# Altium PCB TK517_P5V0-PSU.PcbDoc
Units mm, origin at the board's own origin, x right, y up, seen from the top; angles counter-clockwise.
Board outline 77.5 x 82.75 mm, 4 copper layers (TopLayer, InternalPlane1, InternalPlane2, BottomLayer); 15 components, 10 nets, 74 pads, 0 vias.
Unrouted connection lines stored in the file: 1.
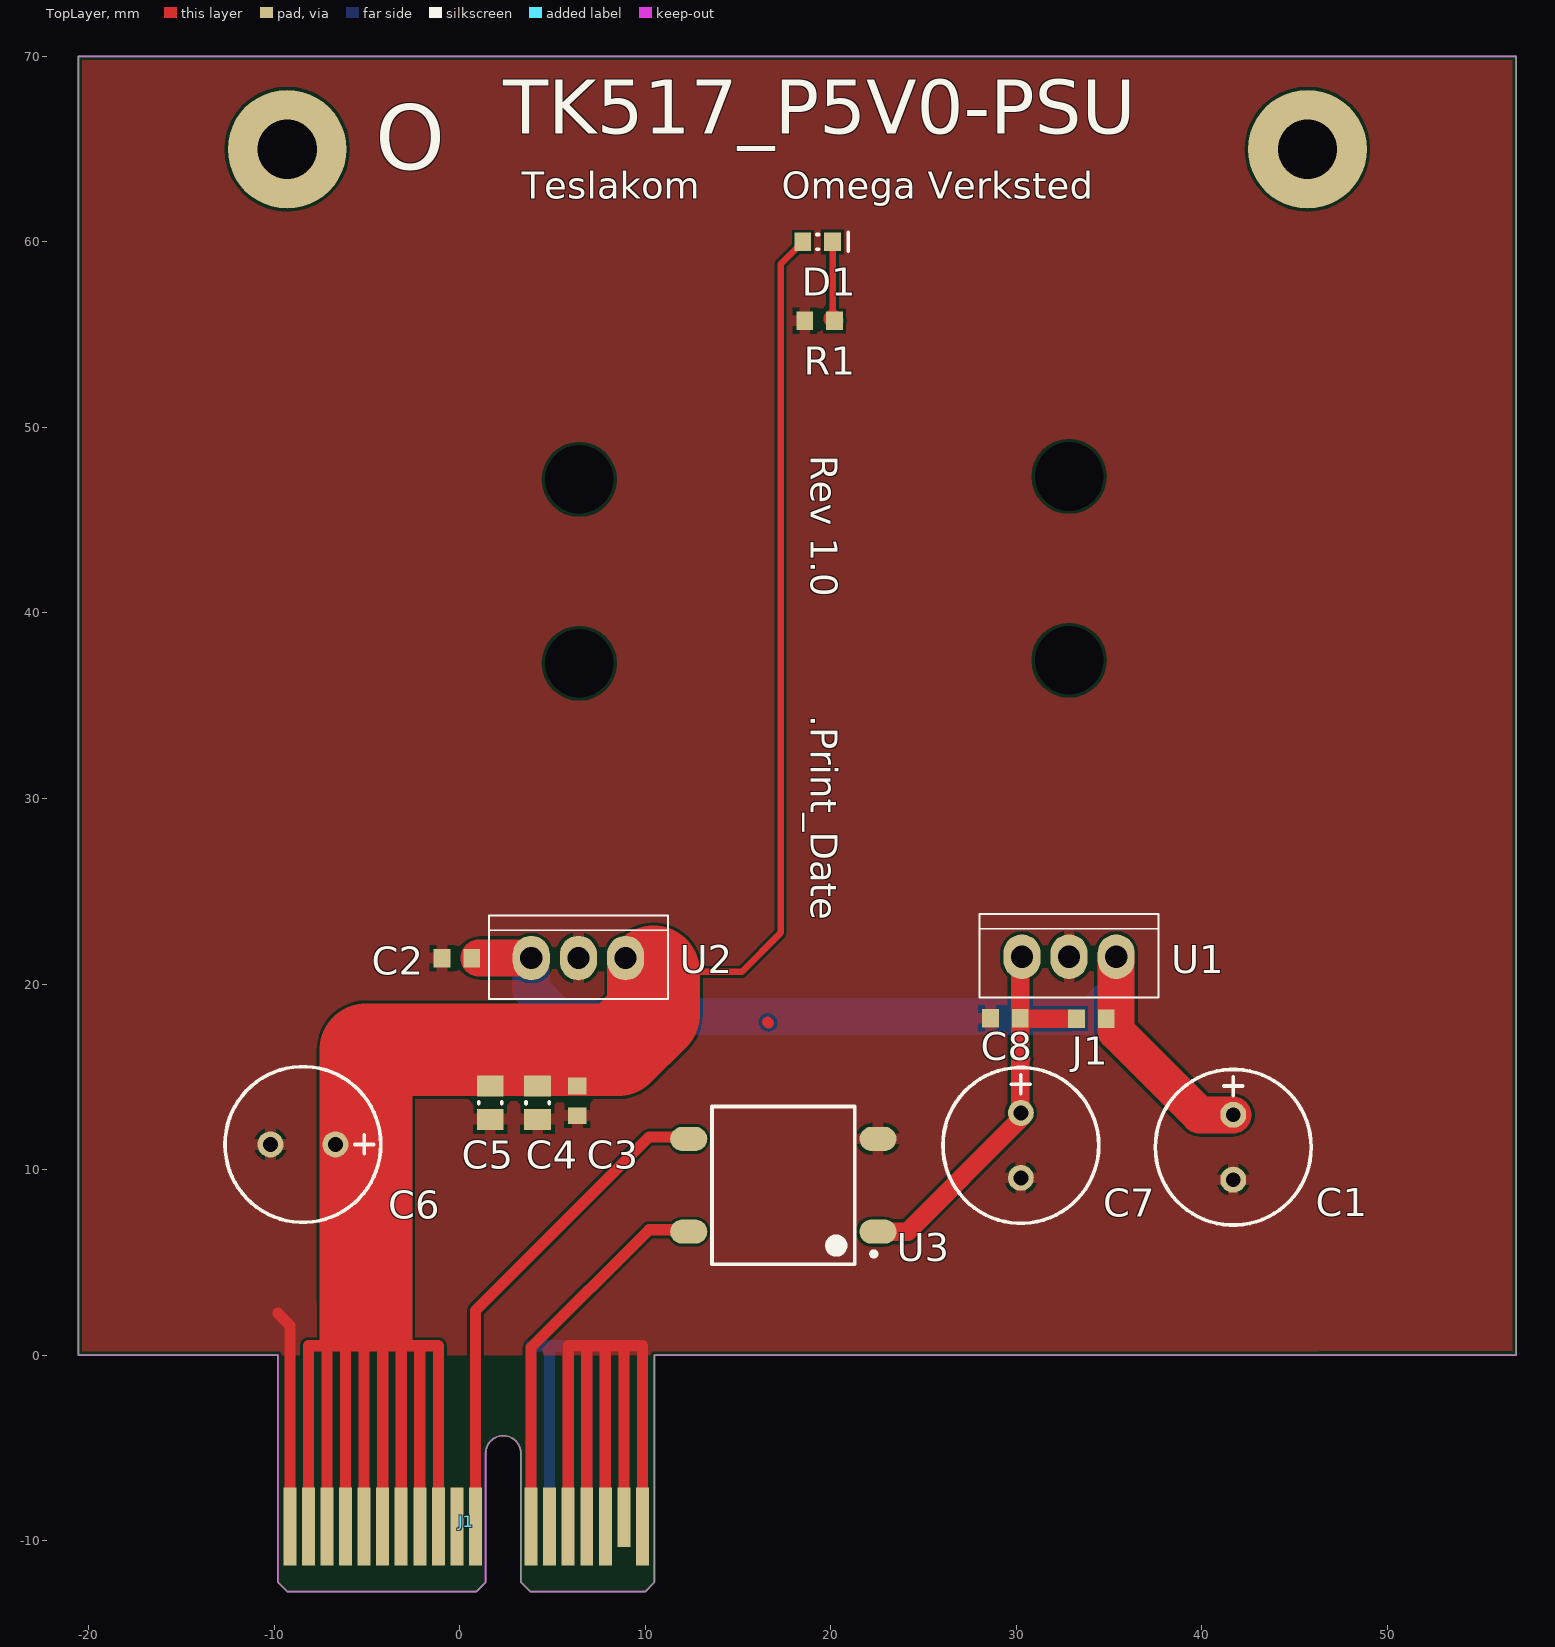
[diagram p0: TopLayer view]
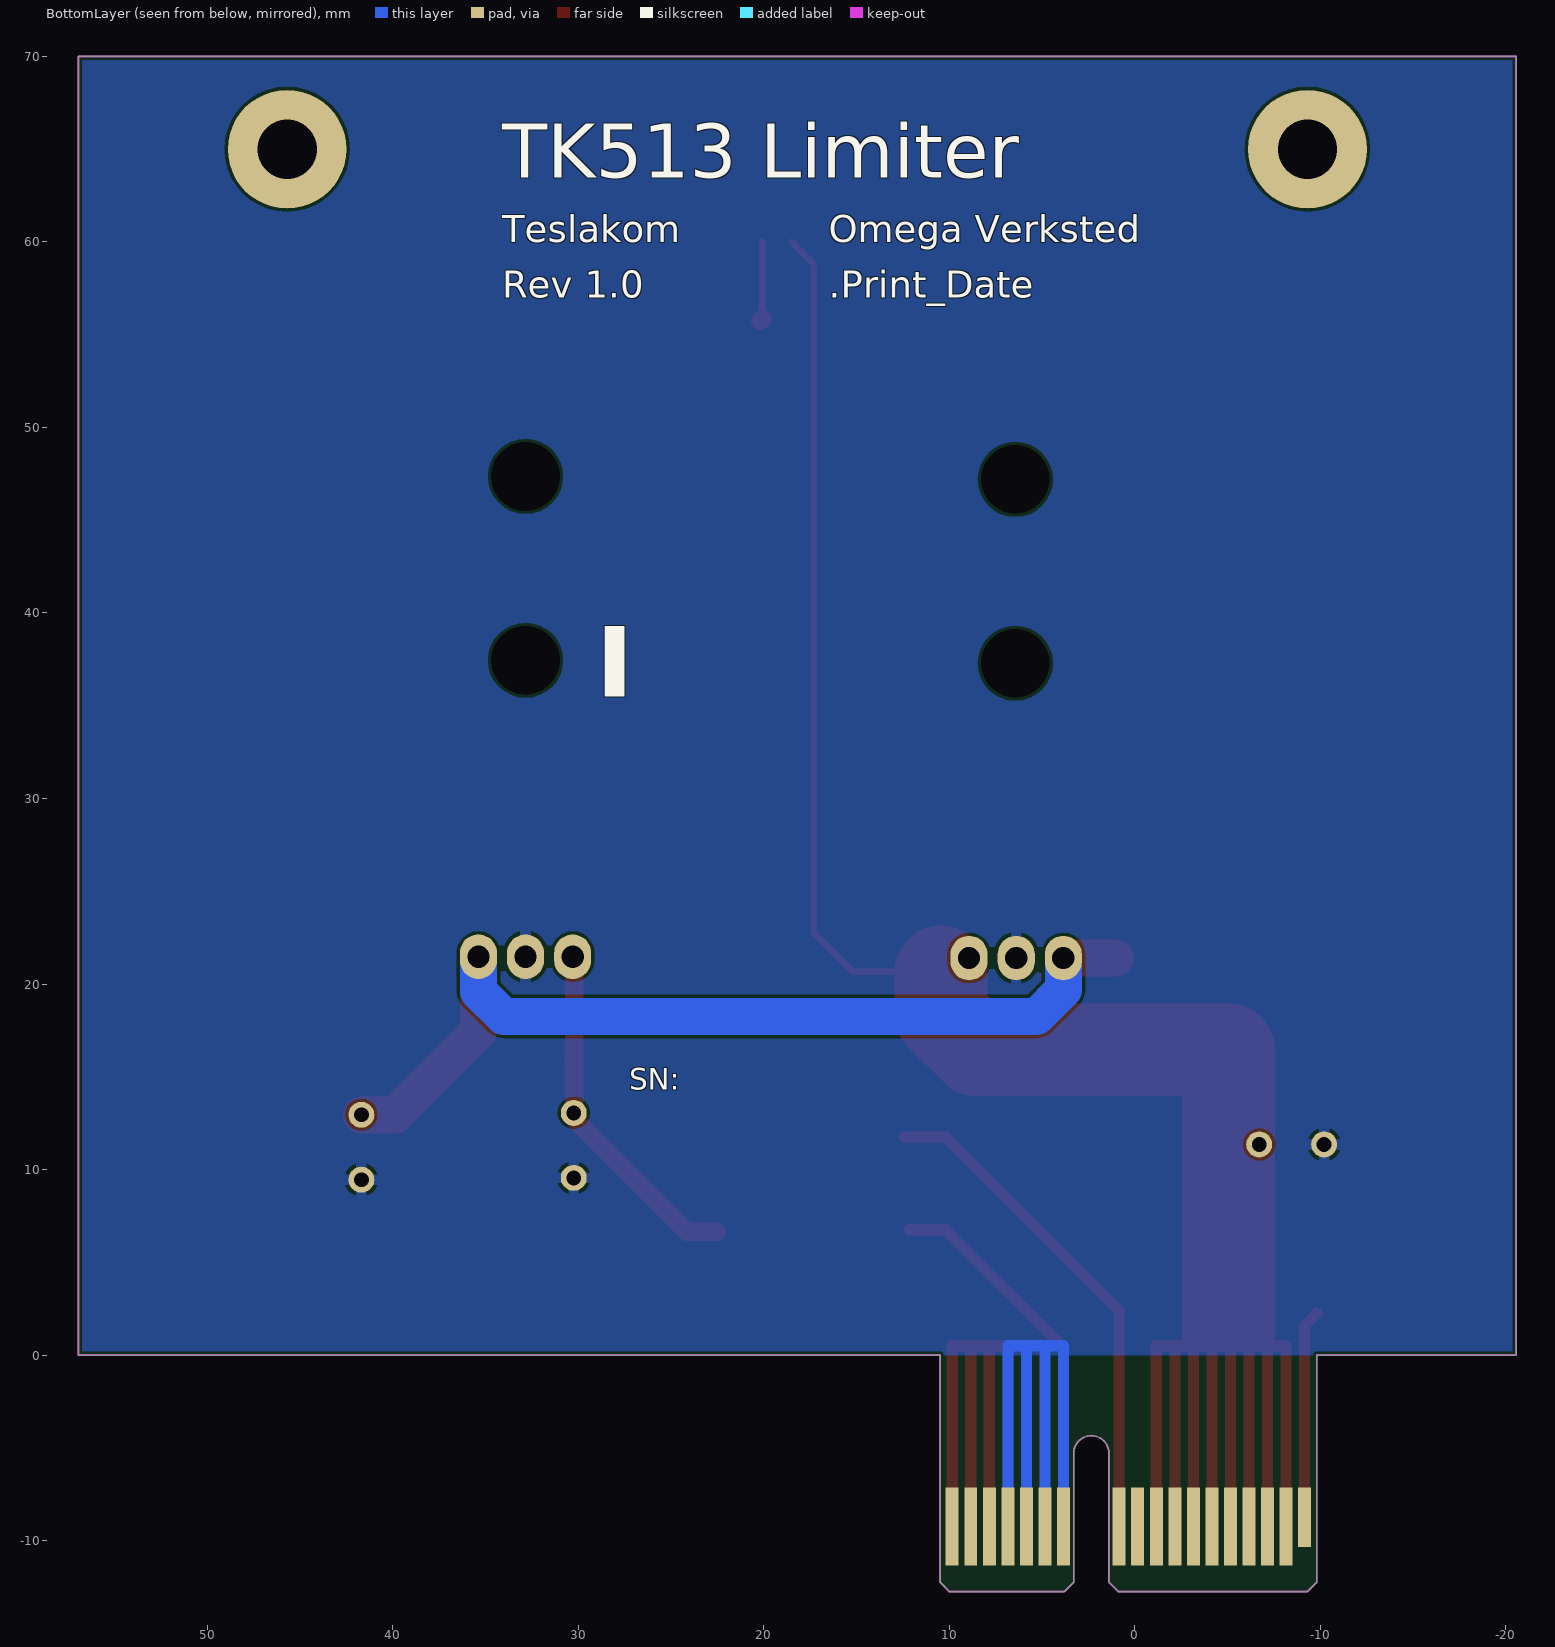
[diagram p1: BottomLayer view, seen from below]
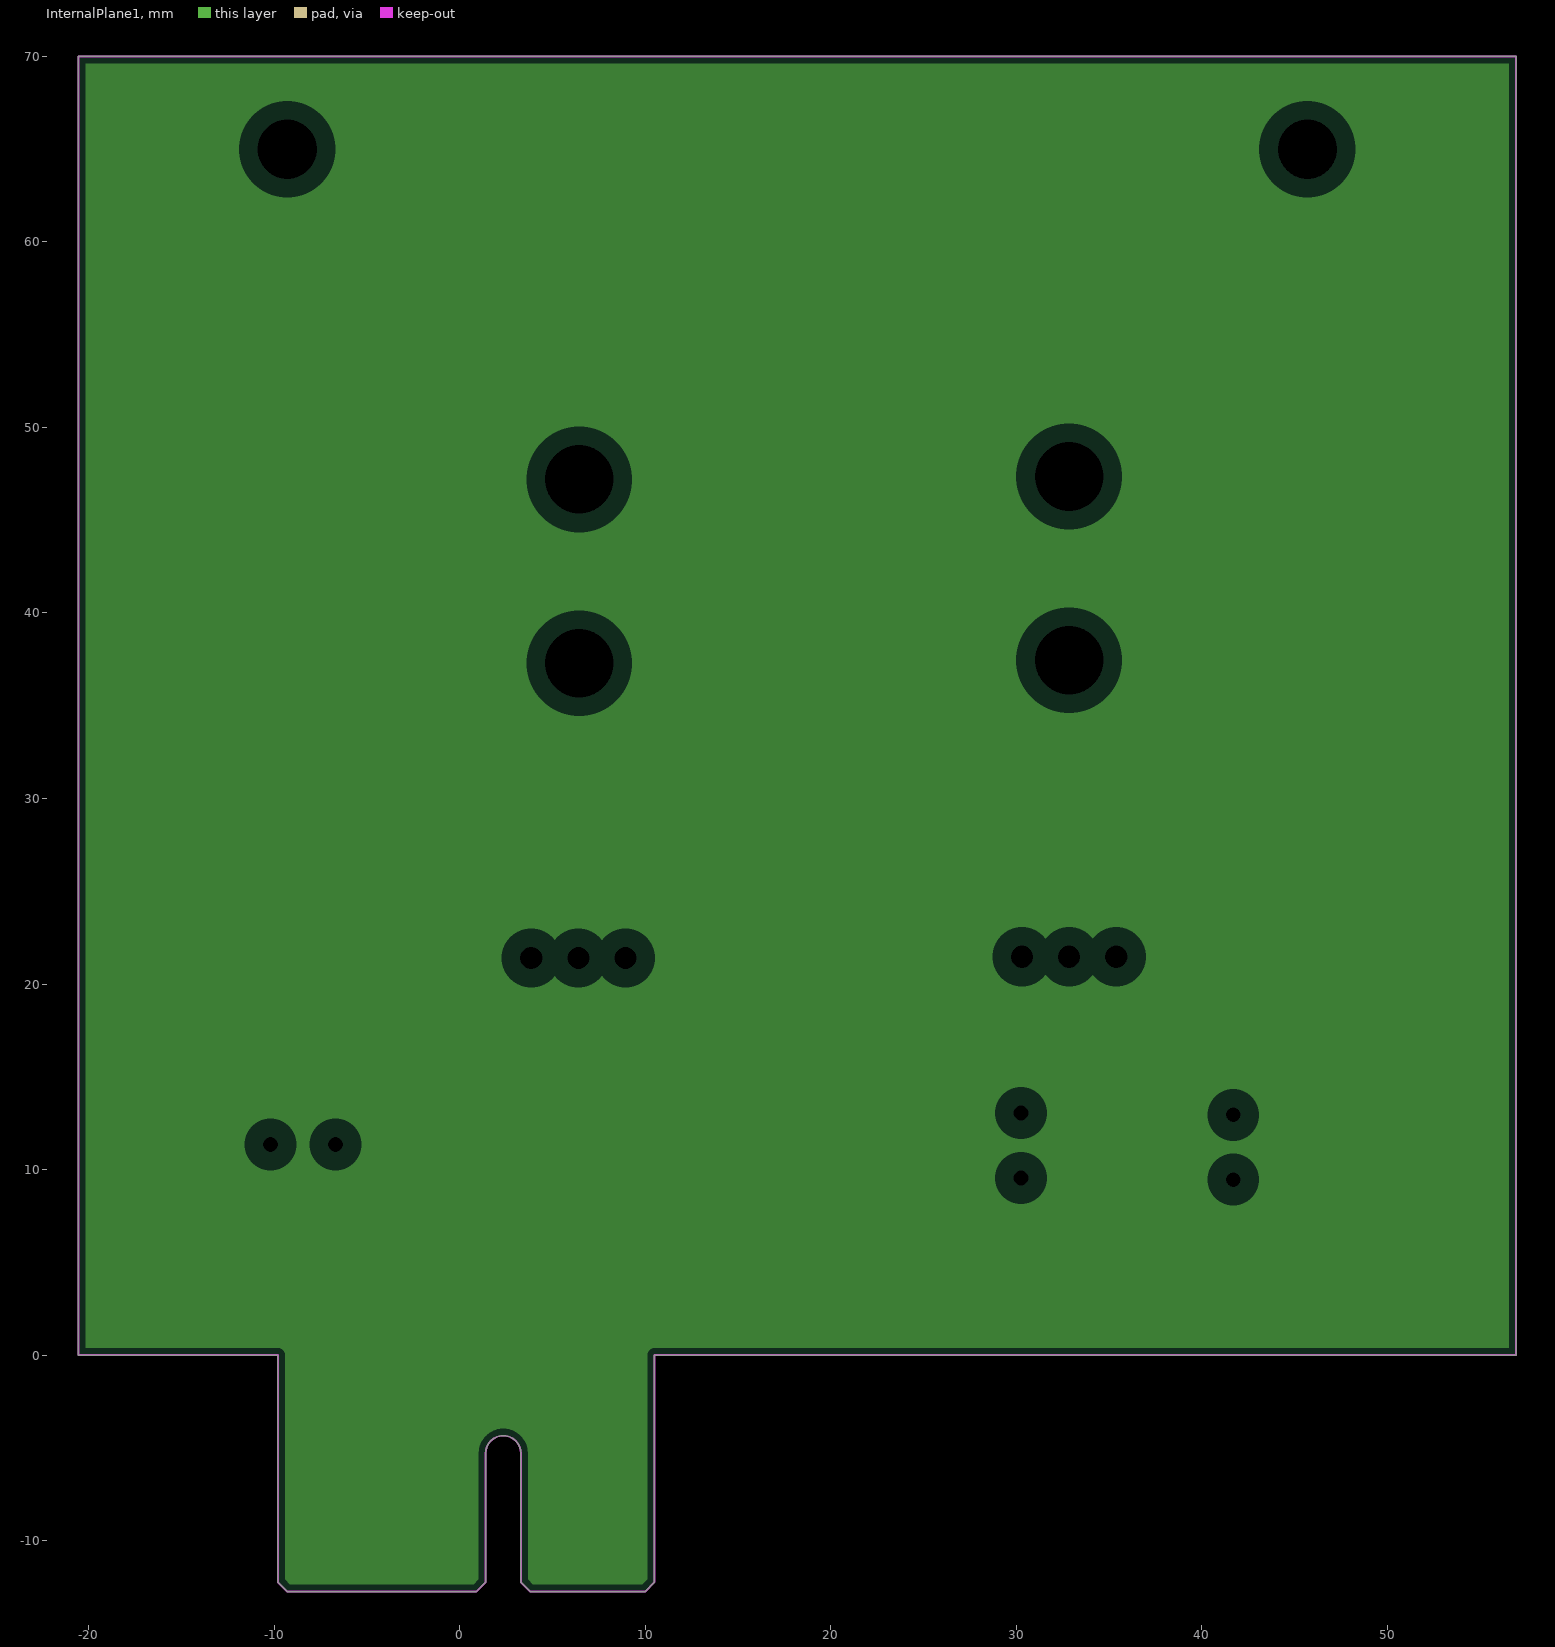
[diagram p2: InternalPlane1, clearances drawn from the general rule]
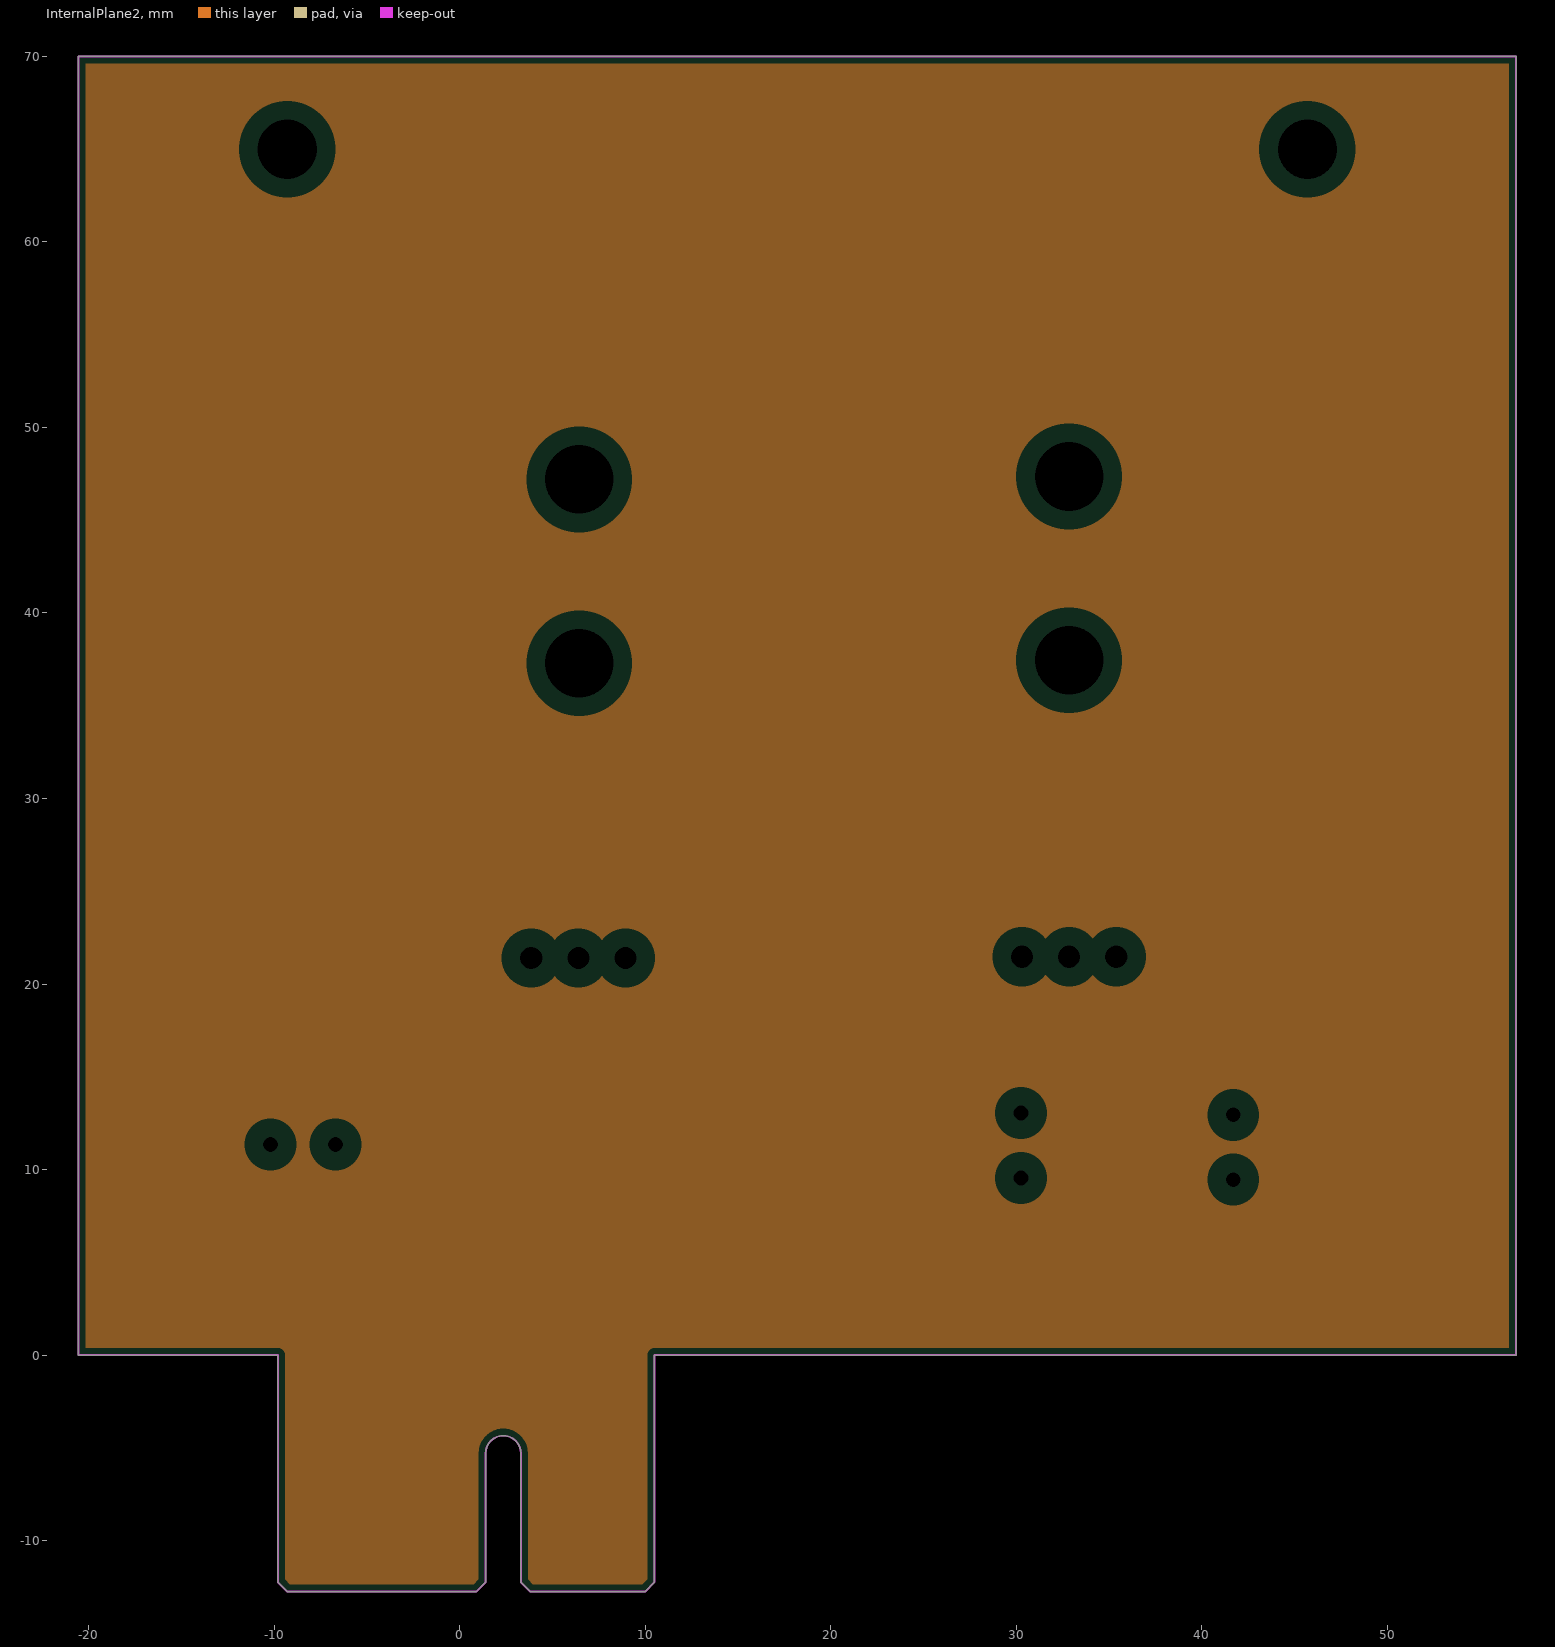
[diagram p3: InternalPlane2, clearances drawn from the general rule]

## Layer stack, top to bottom
TopSolder: solder mask 0.0102, Solder Resist, Dk 3.5
TopLayer: signal copper 0.0178
Dielectric1: core 0.32, FR-4, Dk 4.8
InternalPlane1: plane copper 0.0356
Dielectric2: prepreg 0.32, FR-4, Dk 4.8
InternalPlane2: plane copper 0.0356
Dielectric3: core 0.32, FR-4, Dk 4.8
BottomLayer: signal copper 0.0178
BottomSolder: solder mask 0.0102, Solder Resist, Dk 3.5

## Board outline
-20.55,0 -9.8,0 -9.8,-12.25 -9.3,-12.75 0.9,-12.75 1.4,-12.25 1.4,-5.3 cw(c2.35,-5.3) 3.3,-5.3 3.3,-12.25 3.8,-12.75 10,-12.75 10.5,-12.25 10.5,0 56.95,0 56.95,70 -20.55,70

## Design rules (kind name [scope] priority, off if disabled: settings)
Clearance [All] p1: gap=0.16 ignorepadtopadclearanceinfootprint=FALSE except(0: Arc-Text Arc-Hole Track-Text Track-Hole SMDPad-Text SMDPad-Hole THPad-Text THPad-Hole Via-Text Via-Hole Fill-Text Fill-Hole Poly-Text Poly-Hole Region-Text Region-Hole Text-Text Text-Hole)
Height [All] p1: minheight=0 maxheight=200 prefheight=12.7
HoleSize [All] p1: absolutevalues=TRUE maxlimit=6.35 minlimit=0.3 maxpercent=80.000 minpercent=20.000
MinimumSolderMaskSliver [All] p1: minsoldermaskwidth=0.1
PlaneClearance [All] p1: clearance=1
PlaneConnect [All] p1: planeconnectstyle=Relief reliefexpansion=0.508 reliefentries=4 reliefconductorwidth=1 reliefairgap=0.254
PolygonConnect TheBestRule [IsVia AND InNet('GND')] p1: connectstyle=Direct reliefconductorwidth=0.4 reliefentries=4 polygonreliefangle="90 Angle" airgapwidth=0.2
PolygonConnect [All] p2: connectstyle=Relief reliefconductorwidth=0.6 reliefentries=4 polygonreliefangle="90 Angle" airgapwidth=0.2
RoomDefinition TK517_P5V0-PSU [InComponentClass('TK517_P5V0-PSU')] p1: confinementstyle=ConfineOut formatcopy=TRUE lockcomponents=FALSE outline 10.5,0 -9.8,0 -9.8,-7 10.5,-7
RoutingVias [All] p1: holewidth=0.711 width=1.27 viastyle="Through Hole" minholewidth=0.711 minwidth=1.27 maxholewidth=0.711 maxwidth=1.27
SilkToSolderMaskClearance [IsPad] p1: minsilkscreentomaskgap=0.178 clearancetoexposedcopper=TRUE
SolderMaskExpansion [All] p1: expansion=0.102
Width [All] p1: maxlimit=10 minlimit=0.16 preferedwidth=0.4
24 further rules are at their usual default settings.

## Classes and differential pairs
component class TK517_P5V0-PSU: C1 C2 C3 C4 C5 C6 C7 C8 D1 J1 R1 U1 U2 U3

## Components (designator, comment, footprint, x,y, rotation, side; value= is the part's Value field where it differs from the comment)
C1 "330uF" CAPPR35D08H16 41.7,9.45 r90 top
C2 "220nF" CAPC0603(1608)55_N -0.15,21.4 r0 top
C3 "100nF" CAPC0603(1608)55_N 6.35,13.7 r90 top
C4 "4.7uF" CAPC0805(2012)100_N 4.2,13.6 r90 top
C5 "10uF" CAPC0805(2012)100_N 1.65,13.6 r90 top
C6 "330uF" CAPPR35D08H16 -10.2,11.35 r0 top
C7 "2200uF" CAPPR35D08H16 30.25,9.55 r90 top
C8 "220nF" CAPC0603(1608)55_N 29.417,18.15 r0 top
D1 "SMD LED Red" I_LEDC0603(1608)_N 19.3,60 r0 top
J1 "0R" RESC0603(1608)_N 34.05,18.129 r180 top
J1 "PCI_Express-36P" PCIeX1-GF-2D-1000-1K-O36 0.35,-9.25 r0 top
R1 "560R" RESC0603(1608)_N 19.4,55.75 r0 top
U1 "LM7812" TO-220-3P#1 32.85,21.475 r180 top
U2 "LM7805ACT" TO-220-3P#2 6.4,21.4 r180 top
U3 "Full bridge rectifier" SOP500P1010X260-4N 17.45,9.15 r180 top

## Footprints (in the part's own frame and the unit in brackets; to place one, negate y for a bottom-side part, rotate by r counter-clockwise, add the part's x,y. Pads: shape width x height; smd on the part's side, far side on the other; paste and mask are expansions set on the pad)
CAPC0603(1608)55_N [mm] "Chip Capacitor, Body 1.6x0.8mm, Height 0.55mm, IPC Medium Density"
  rect 0.9x1 smd: 1(-0.8,0) 2(0.8,0)
  body extent -0.87,-0.48 0.88,0.47, height 0.55
CAPC0805(2012)100_N [mm] "Chip Capacitor, Body 2.0x1.2mm, Height 1.0mm, IPC Medium Density"
  rect 1.15x1.45 smd: 1(-0.9,0) 2(0.9,0)
  silkscreen extent -0.05,-0.62 0.05,0.63, body extent -1.1,-0.72 1.1,0.73, height 1
CAPPR35D08H16 [mm] "D=8mm, Pitch=3.5mm, H=16mm"
  round 1.4 hole 0.8: 1(0,0) 2(3.5,0)
  silkscreen extent -2.45,-4.2 5.95,4.2, body extent -2.25,-4 5.75,4, height 16
I_LEDC0603(1608)_N [mm] "Chip Resistor, Body 1.6x0.8mm, IPC Medium Density"
  rect 0.9x1 smd: 1(-0.8,0) 2(0.8,0)
  silkscreen extent -0.05,-0.51 1.65,0.51, body extent -0.85,-0.45 0.85,0.45, height 0.9
PCIeX1-GF-2D-1000-1K-O36 [mm] "Golden finger, PCIeX1, Dual, Opposite, Pitch 1mm, 36-Position"
  rect 0.7x3.2 smd far side paste-1: A1(-9.5,0.5)
  rect 0.7x4.2 smd far side paste-1: A2(-8.5,0) A3(-7.5,0) A4(-6.5,0) A5(-5.5,0) A6(-4.5,0) A7(-3.5,0) A8(-2.5,0) A9(-1.5,0) A10(-0.5,0) A11(0.5,0) A12(3.5,0) A13(4.5,0) A14(5.5,0) A15(6.5,0) A16(7.5,0) A17(8.5,0) A18(9.5,0)
  rect 0.7x4.2 smd paste-1: B1(-9.5,0) B2(-8.5,0) B3(-7.5,0) B4(-6.5,0) B5(-5.5,0) B6(-4.5,0) B7(-3.5,0) B8(-2.5,0) B9(-1.5,0) B10(-0.5,0) B11(0.5,0) B12(3.5,0) B13(4.5,0) B14(5.5,0) B15(6.5,0) B16(7.5,0) B18(9.5,0)
  rect 0.7x3.2 smd paste-1: B17(8.5,0.5)
RESC0603(1608)_N [mm] "Chip Resistor, Body 1.6x0.8mm, IPC Medium Density"
  rect 0.9x1 smd: 1(-0.8,0) 2(0.8,0)
  body extent -0.85,-0.47 0.85,0.47, height 0.6
SOP500P1010X260-4N [mm] "SOP, 4-Leads, Body 8,32x8,35mm, Pitch 5,00mm, IPC Medium Density"
  oval 2x1.3 smd: 1(-5.1,2.5) 2(-5.1,-2.5) 3(5.1,-2.5) 4(5.1,2.5)
  silkscreen extent -5,-4.25 3.85,4.25, body extent -4.25,-4.25 4.25,4.25, height 2.6
TO-220-3P#1 [mm]
  oval 2x2.4 hole 1.2: 1(2.54,0) 2(0,0) 3(-2.54,0)
  silkscreen extent -4.83,-2.3 4.83,2.2, body extent -4.83,-2.3 4.83,2.2, height 19.3
TO-220-3P#2 [mm]
  oval 2x2.4 hole 1.2 unplated: 1(2.54,0) 2(0,0) 3(-2.54,0)
  silkscreen extent -4.83,-2.3 4.83,2.2, body extent -4.83,-2.3 4.83,2.2, height 19.3

## Part data
C1 C6 C7: library part 3891, "25V elektrolytt", pakketype=TH
  C1 C6: id=3891, leverandor=Farnell, leverandor_varenr=2346202, navn=330uF, pakke_opprettet="13.11.2016 14.32.40", pakke_opprettet_av=1335, pris=0, produsent=Rubycon, symbol_opprettet="28.06.2014 15.26.13", symbol_opprettet_av=815
  C7: navn=2200uF
C2 C8: library part 3934, "Capacitor", id=3934, navn=220nF, nokkelord=kondensator, pakke_opprettet="18.02.2015 14.18.13", pakke_opprettet_av=815, pakketype=0603, pris=0, symbol_opprettet="14.11.2014 20.19.34", symbol_opprettet_av=815
C3: library part 3028, "X7R 50V 5%", id=3028, leverandor=Farnell, leverandor_varenr=1759122, navn=100nF, nokkelord="Kondensator, Capacitor, CAP", pakke_opprettet="18.02.2015 14.18.13", pakke_opprettet_av=815, pakketype=0603, pris=1, produsent=Multikomp, symbol_opprettet="14.11.2014 20.19.34", symbol_opprettet_av=815
C4: library part 4248, "X5R 10V 10%", id=4248, navn=4.7uF, pakke_opprettet="14.11.2014 20.52.01", pakke_opprettet_av=815, pakketype=0805, pris=0, symbol_opprettet="14.11.2014 20.19.34", symbol_opprettet_av=815
C5: library part 4046, "X5R 6.3V 10%", id=4046, leverandor=Farnell, leverandor_varenr=2320852, navn=10uF, pakke_opprettet="14.11.2014 20.52.01", pakke_opprettet_av=815, pakketype=0805, pris=0, symbol_opprettet="14.11.2014 20.19.34", symbol_opprettet_av=815
D1: library part 2209, antall=50, beskrivelse=SMD, dybde=2, hylle=13, id=2209, kolonne=0, lager_type=Fremlager, leverandor=Farnell, leverandor_varenr=8554641, navn="SMD LED Red", nokkelord=SMD, pakke_opprettet="06.07.2014 18.55.44", pakke_opprettet_av=815, pakketype=0603, pris=1, produsent=Avago, rad=0, rom=OV, symbol_opprettet="06.07.2014 18.59.47", symbol_opprettet_av=815
J1 R1: library part 3435, "0.1W 1% Thick film resistor"
  J1: navn=0R
  R1: antall=100, dybde=42, hylle=6, id=3435, kolonne=0, lager_type=Fremlager, navn=560R, pakke_opprettet="08.07.2014 21.15.30", pakke_opprettet_av=815, pakketype=0603, pris=0, rad=-1, rom=OV, symbol_opprettet="08.07.2014 21.16.33", symbol_opprettet_av=815
J1: library part 3177, "PCI express PCB kortkankonnektor", id=3177, navn=PCIeX1-GF-2D-1000-1K-O36, pakke_opprettet="07.06.2015 17.49.10", pakke_opprettet_av=815, pakketype=-, pris=0, symbol_opprettet="06.07.2014 17.26.37", symbol_opprettet_av=815
U1: library part 1433, "Voltage Regulator 12V 1A", antall=50, dybde=0, hylle=9, kolonne=0, navn=LM7812, pakketype=TH, rad=2, rom=OV
U2: library part 1433, "Voltage Regulator 5V 1A", antall=50, dybde=0, hylle=9, id=1433, kolonne=0, lager_type=Fremlager, leverandor=Farnell, leverandor_varenr=2296047, navn=LM7805ACT, pakke_opprettet="09.06.2015 21.08.41", pakke_opprettet_av=815, pakketype=TH, pris=8, produsent=Fairchild, rad=0, rom=OV, symbol_opprettet="20.06.2015 13.45.33", symbol_opprettet_av=815
U3: library part "DBLS07G Rectifier", farnell=1299301

## Free pads (board coordinates)
  round 6.4 hole 3.2 unplated: 0(-9.3,65) 0(45.7,65)
  round 0 hole 3.7: 2(6.45,37.29) 2(6.45,47.2) 2(32.85,37.45) 2(32.85,47.36)

## Nets (pads, with @x,y where several pads share a name; then routed paths per layer and width w, separated by ;. In a path a pad name is that pad's centre, name@x,y a point inside that pad or via, vN(x,y) a via of type N, cw(c..) or ccw(c..) an arc to the next point about the centre after c; other vN are vias at no path point)
2: 
AC_L1: J1.B11 U3.3 | length 27.1
  TopLayer w0.6: J1.B11 0.85,2.4 10.2,11.75 U3.3@12.45,11.75
AC_L2: J1.B12 U3.4 | length 20.6
  TopLayer w0.6: J1.B12 3.85,0.4 10.2,6.75 U3.4@12.15,6.75
GND: C1.1 C2.1 C3.1 C4.1 C5.1 C6.1 C7.1 C8.1 J1.A12 J1.A13 J1.A14 J1.A15 J1.B1 J1.B14 J1.B15 J1.B16 J1.B17 J1.B18 R1.1 U1.2 U2.2 U3.2 | length 106
  TopLayer w0.6: -9.8,2.25 -9.15,1.6 J1.B1 ; J1.B14 5.85,0.5 6.85,0.5 ; J1.B15 6.85,0.5 ; J1.B16 7.85,0.5 ; J1.B17 8.85,0.45 8.9,0.5 ; J1.B18 9.85,0.5 8.9,0.5 ; 6.85,0.5 7.85,0.5 ; 7.85,0.5 8.9,0.5
  BottomLayer w0.6: J1.A12 3.85,0.5 4.85,0.5 ; J1.A13 4.85,0.5 ; J1.A14 5.85,0.5 ; J1.A15 6.85,0.5 5.85,0.5 ; 4.85,0.5 5.85,0.5
NetC1_2: C1.2 C2.2 J1.1 U1.3 U2.1 | length 51.3
  TopLayer w1: C1.2@41.69,12.94 C1.2
  TopLayer w2: C2.2@1.05,21.4 U2.1 ; U1.3 35.39,17.44 39.89,12.94 C1.2@41.69,12.94
  BottomLayer w2: U2.1 3.86,19.69 5.3,18.25 34.029,18.25 35.39,19.611 U1.3
NetC7_2: C7.2 C8.2 J1.2 U1.1 U3.1 | length 22.1
  TopLayer w0.6: 30.217,15.7 30.467,15.95 ; C8.2 C8.2@30.238,18.129 ; U1.1@30.217,21.382 U1.1
  TopLayer w1: U3.1 24.15,6.65 30.217,12.717 30.217,15.7 C8.2 U1.1@30.217,21.382 ; C8.2@30.238,18.129 J1.2@33,18.129
NetD1_2: D1.2 R1.2 | length 4.4
  TopLayer w0.35: R1.2@20.1,55.85 D1.2
  TopLayer w0.6: 16.6,17.95 16.65,17.9
  TopLayer w1: R1.2@20.1,55.85 R1.2
VCC_EXTRA: J1.A16
VCC_P5V0: C3.2 C4.2 C5.2 C6.2 D1.1 J1.B2 J1.B3 J1.B4 J1.B5 J1.B6 J1.B7 J1.B8 J1.B9 U2.3 | length 165.2
  TopLayer w0.35: 10.45,20.65 15.2,20.65 17.3,22.75 17.3,58.8 D1.1
  TopLayer w0.6: J1.B2 -8.15,0.5 -7.15,0.5 ; J1.B3 -7.15,0.5 ; J1.B4 -6.15,0.5 ; J1.B5 -5.15,0.5 ; -5.05,2.75 -5.15,2.75 -5.15,0.5 ; J1.B6 -4.15,0.5 ; J1.B7 -3.15,0.5 ; J1.B8 -2.15,0.5 ; J1.B9 -1.15,0.5 -2.15,0.5 ; 2.5,14.5 2.65,14.5 ; -7.15,0.5 -6.15,0.5 ; -6.15,0.5 -5.15,0.5 ; -5.15,0.5 -4.15,0.5 ; -4.15,0.5 -3.15,0.5 ; -3.15,0.5 -2.15,0.5
  TopLayer w5: -5.05,2.85 -5.05,16.45 8.55,16.45 10.45,18.35 10.45,20.65
VCC_P18V: J1.A18
pads on no net: J1.A1 J1.A2 J1.A3 J1.A4 J1.A5 J1.A6 J1.A7 J1.A8 J1.A9 J1.A10 J1.A11 J1.A17 J1.B10 J1.B13

## Polygon pours and split planes (outlines as drawn)
GND on BottomLayer "Bottom layer GND" (solid, remove dead copper, pour order 4): -20.5,70 -20.5,0 57,0 57,70
GND on TopLayer "Top layer GND" (solid, remove dead copper, pour order 8): -20.5,70 -20.5,0 57,0 57,70
no net on InternalPlane1 (split plane): 56.567,69.617 56.567,0.383 10.5,0.383 10.425,0.375 10.353,0.354 10.287,0.318 10.229,0.271 10.182,0.213 10.146,0.147 10.125,0.075 10.117,0 10.117,-12.091 9.841,-12.367 3.959,-12.367 3.683,-12.091 3.683,-5.3 3.675,-5.151 3.65,-5.003 3.608,-4.86 3.551,-4.722 3.479,-4.591 3.392,-4.469 3.293,-4.357 3.181,-4.258 3.059,-4.171 2.928,-4.099 2.79,-4.042 2.647,-4 2.499,-3.975 2.35,-3.967 2.201,-3.975 2.053,-4 1.91,-4.042 1.772,-4.099 1.641,-4.171 1.519,-4.258 1.407,-4.357 1.308,-4.469 1.221,-4.591 1.149,-4.722 1.092,-4.86 1.05,-5.003 1.025,-5.151 1.017,-5.3 1.017,-12.091 0.741,-12.367 -9.141,-12.367 -9.417,-12.091 -9.417,0 -9.425,0.075 -9.446,0.147 -9.482,0.213 -9.529,0.271 -9.587,0.318 -9.654,0.354 -9.725,0.375 -9.8,0.383 -20.167,0.383 -20.167,69.617
no net on InternalPlane2 (split plane): 56.567,69.617 56.567,0.383 10.5,0.383 10.425,0.375 10.353,0.354 10.287,0.318 10.229,0.271 10.182,0.213 10.146,0.147 10.125,0.075 10.117,0 10.117,-12.091 9.841,-12.367 3.959,-12.367 3.683,-12.091 3.683,-5.3 3.675,-5.151 3.65,-5.003 3.608,-4.86 3.551,-4.722 3.479,-4.591 3.392,-4.469 3.293,-4.357 3.181,-4.258 3.059,-4.171 2.928,-4.099 2.79,-4.042 2.647,-4 2.499,-3.975 2.35,-3.967 2.201,-3.975 2.053,-4 1.91,-4.042 1.772,-4.099 1.641,-4.171 1.519,-4.258 1.407,-4.357 1.308,-4.469 1.221,-4.591 1.149,-4.722 1.092,-4.86 1.05,-5.003 1.025,-5.151 1.017,-5.3 1.017,-12.091 0.741,-12.367 -9.141,-12.367 -9.417,-12.091 -9.417,0 -9.425,0.075 -9.446,0.147 -9.482,0.213 -9.529,0.271 -9.587,0.318 -9.654,0.354 -9.725,0.375 -9.8,0.383 -20.167,0.383 -20.167,69.617

## Keep-outs
KeepOutLayer:
  lines w0.1: 46.3,0 10.5,0 10.5,-12.25 10,-12.75 3.8,-12.75 3.3,-12.25 3.3,-5.3 ccw(c2.35,-5.3) 1.4,-5.3 1.4,-12.25 0.9,-12.75 -9.3,-12.75 -9.8,-12.25 -9.8,0 -20.55,0 -20.55,70 56.95,70 56.95,0 46.3,0 ; -19.3,70 -19.3,70

## Other copper
TopLayer:
  rectangle net VCC_P5V0: -7.55,0.5 -2.55,3.25

## Silkscreen, mask and mechanical layers (free items; w line width, h text height)
TopOverlay:
  text "TK517_P5V0-PSU" at 2.35,64.85 h5
  text "O" at -4.55,62.75 h6
  text "Teslakom" at 3.35,61.85 h2.5
  text "Omega Verksted" at 17.35,61.85 h2.5
  text "Rev 1.0" at 18.45,48.5 h2.5 r270
  text ".Print_Date" at 18.45,34.5 h2.5 r270
BottomOverlay:
  text "TK513 Limiter" at 34.1,62.5 h5
  text "Omega Verksted" at 16.5,59.5 h2.5
  text "Teslakom" at 34.1,59.5 h2.5
  text ".Print_Date" at 16.5,56.5 h2.5
  text "Rev 1.0" at 34.1,56.5 h2.5
  text "T" at 31.323,28.85 h35
  text "SN:" at 27.251,13.889 h2
TopSolder:
  region: 42.755,23.99 42.755,60.82 22.945,60.82 22.945,23.99
  region: 16.355,23.83 16.355,60.66 -3.455,60.66 -3.455,23.83
PCI-SIG Outline:
  lines w0.1: 10.5,-1.55 10.5,-12.25 10,-12.75 3.8,-12.75 3.3,-12.25 3.3,-5.3 ccw(c2.35,-5.3) 1.4,-5.3 1.4,-12.25 0.9,-12.75 -9.3,-12.75 -9.8,-12.25 -9.8,0 -20.55,0 -20.55,70 56.95,70 56.95,0 46.3,0 ; 10.5,0 26,0 ; -19.3,70 -19.3,70
Mechanical7:
  text "46.5mm" at 47.9,-8.5 h1.52
Mechanical15:
  text "10.7mm" at -23.5,-8.4 h1.52